# Altium PCB pcb-acopians-powerspy-ac-power-hw.PcbDoc
Units mm, origin at the board's own origin, x right, y up, seen from the top; angles counter-clockwise.
Board outline 89.94 x 79.95 mm, 2 copper layers (Top Layer, Bottom Layer), stack 1.58 mm thick; 60 components, 43 nets, 218 pads, 0 vias.
Unrouted connection lines stored in the file: 3.
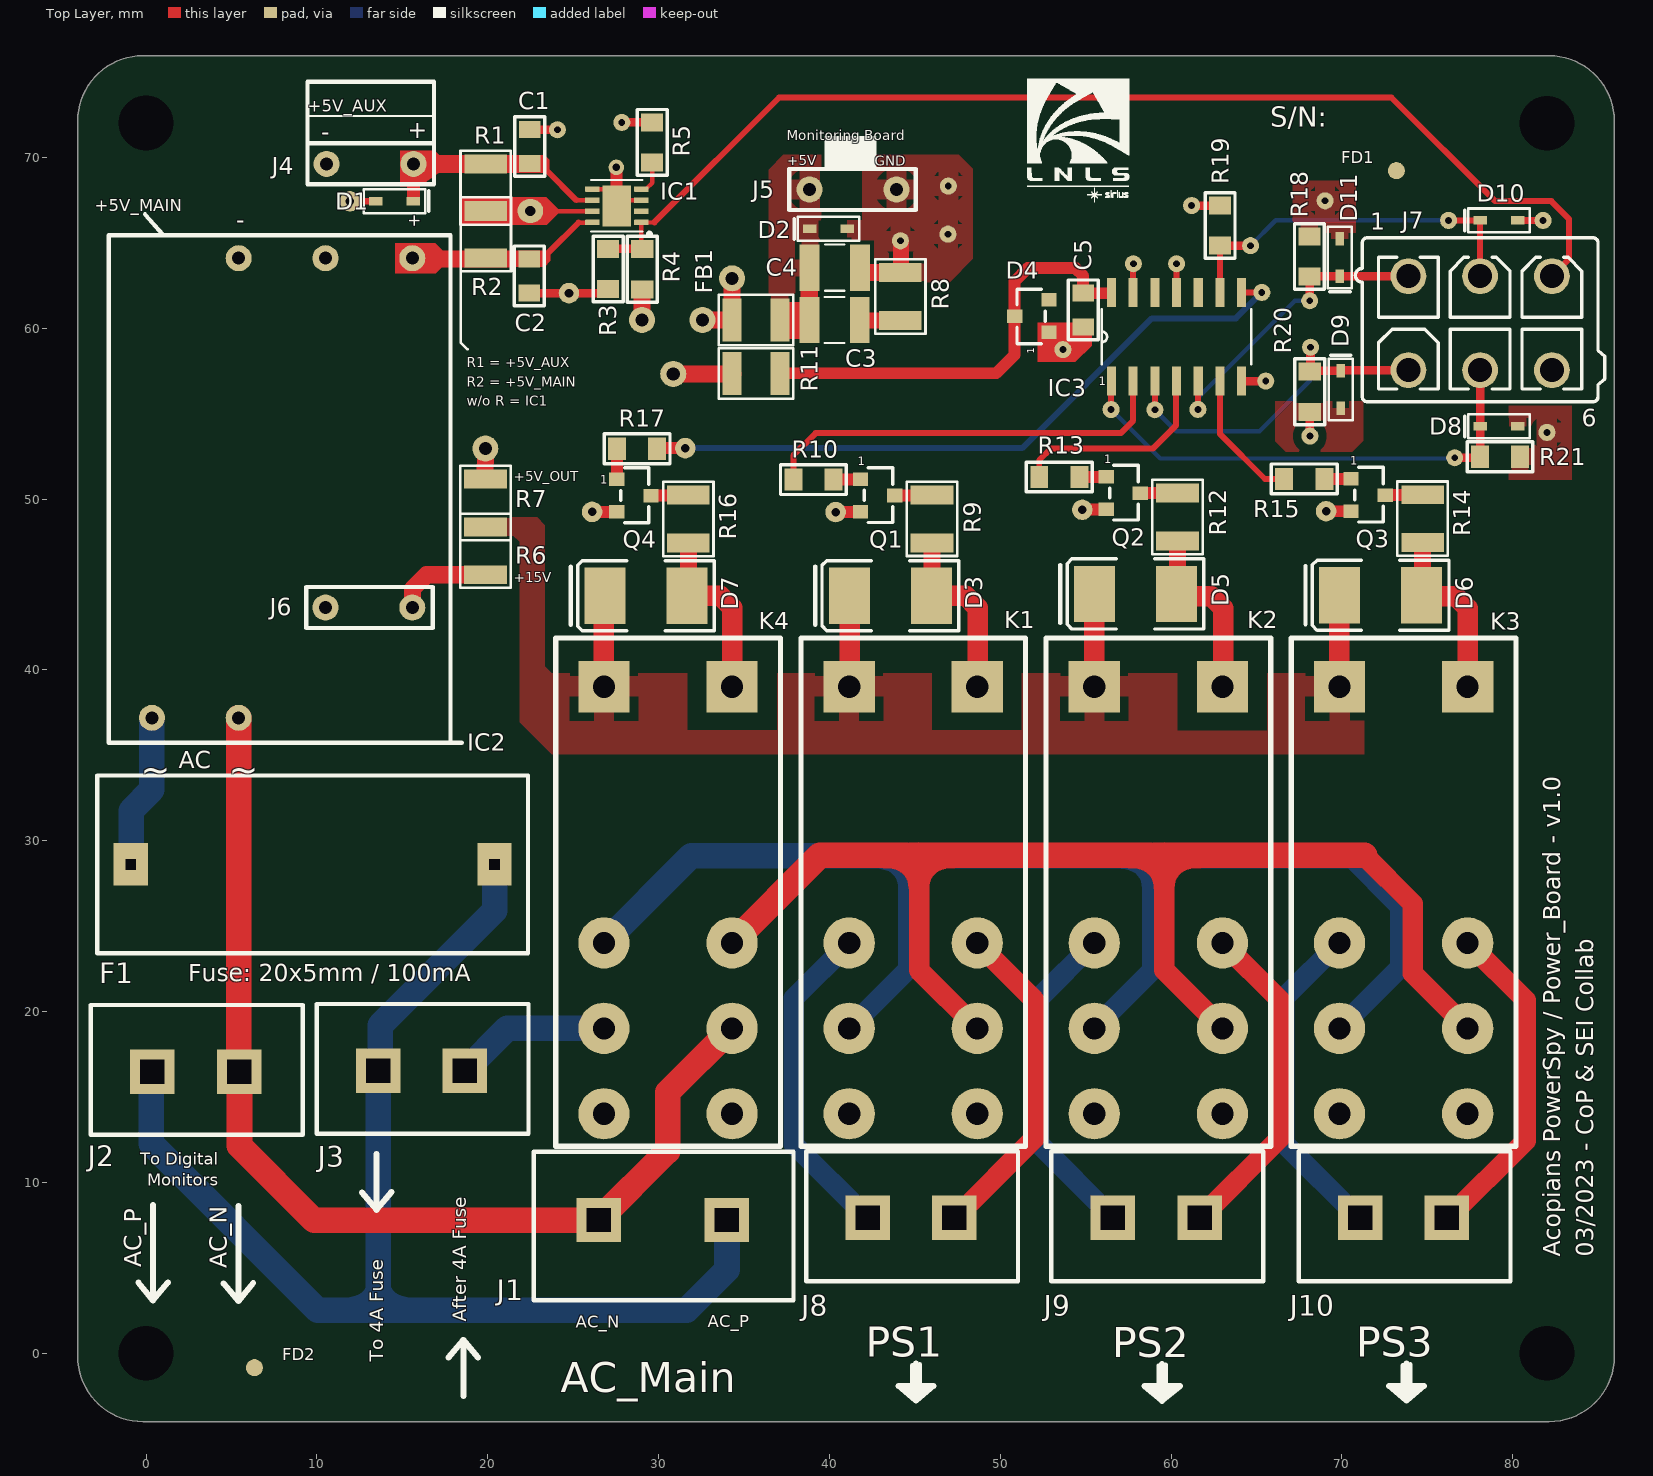
[diagram p0: Top Layer view]
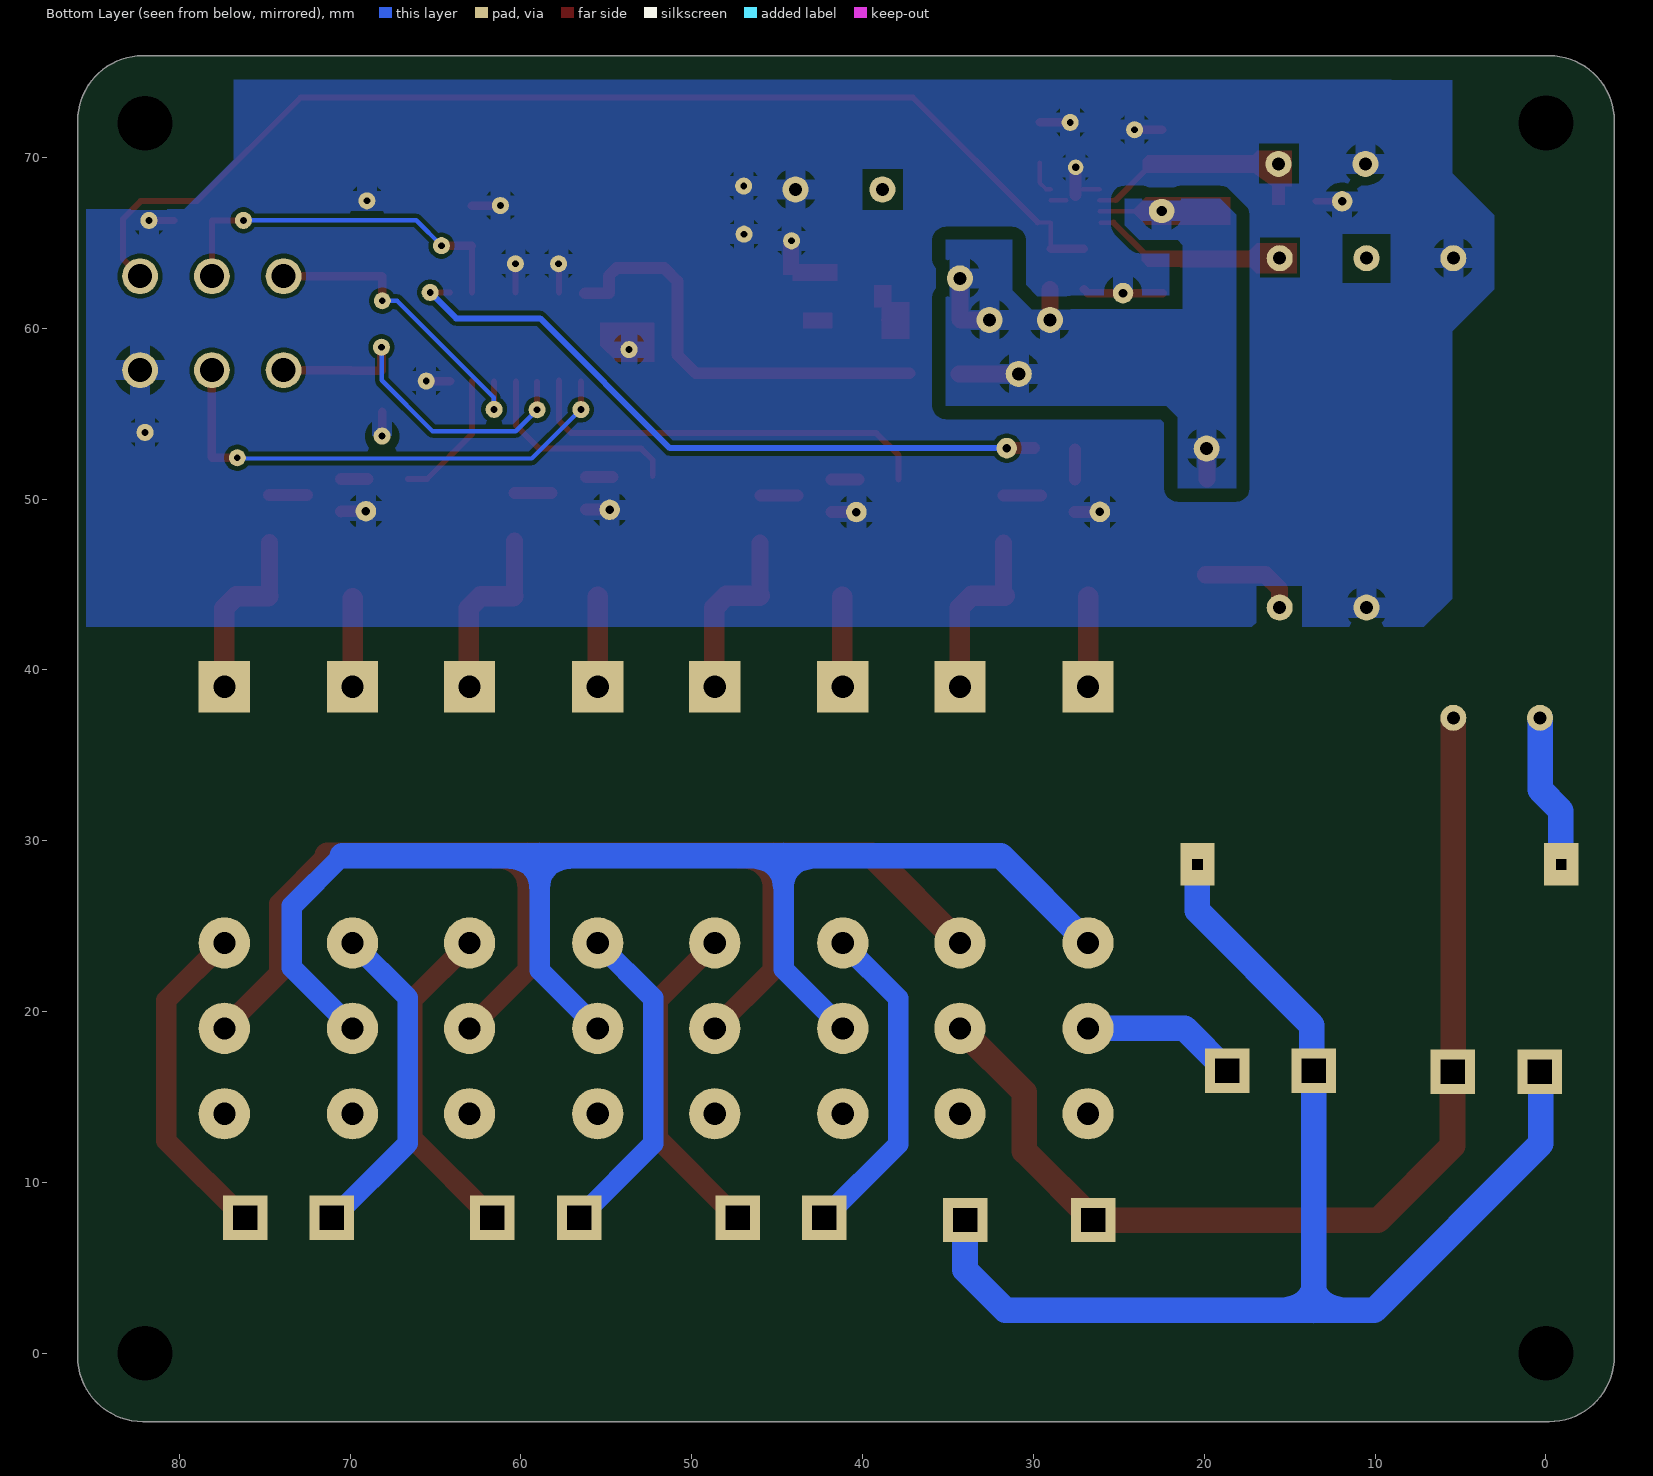
[diagram p1: Bottom Layer view, seen from below]
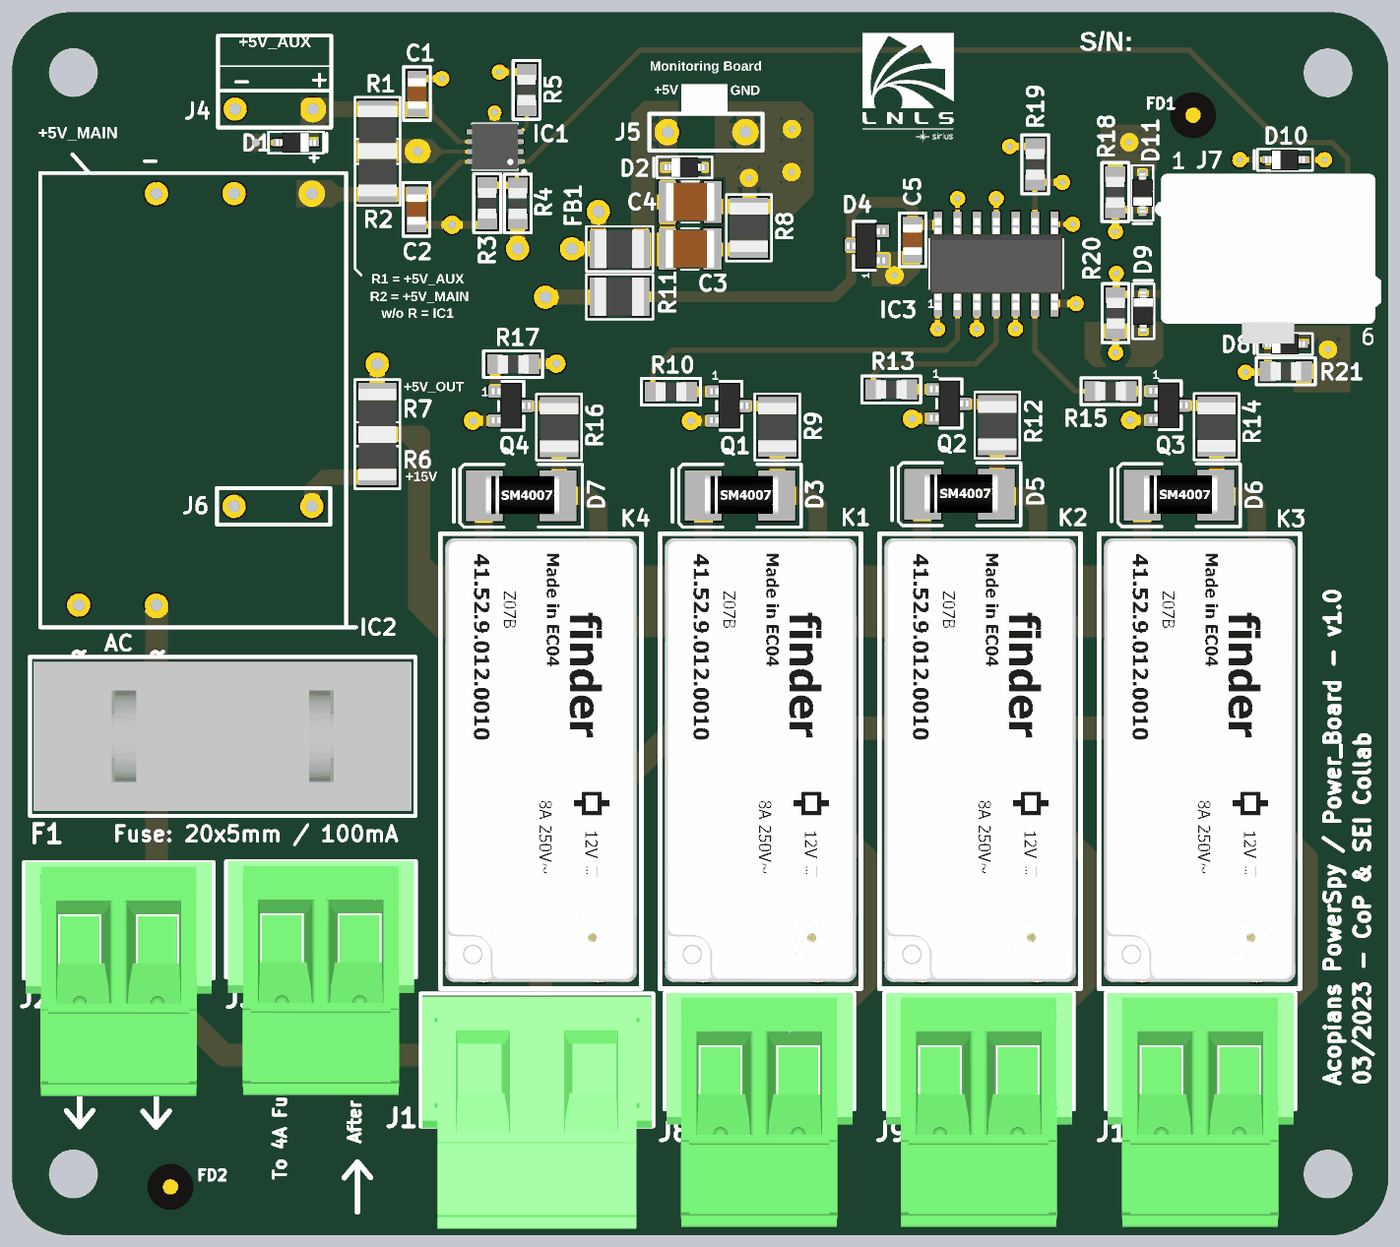
[diagram p2: 3D render of the assembled board from above, using the file's embedded part models]

## Layer stack, top to bottom
Top Solder: solder mask 0.01, Solder Resist, Dk 3.5
Top Layer: signal copper 0.035
Dielectric 1: dielectric 1.51, FR-4, Dk 4.8
Bottom Layer: signal copper 0.035
Bottom Solder: solder mask 0.01, Solder Resist, Dk 3.5

## Board outline
-3.998,-0.19 -3.998,72.138 cw(c-0.188,72.138) -0.188,75.948 82.127,75.948 cw(c82.127,72.138) 85.937,72.138 85.937,-0.19 cw(c82.127,-0.19) 82.127,-4 -0.188,-4 cw(c-0.188,-0.19)

## Design rules (kind name [scope] priority, off if disabled: settings)
Clearance [All] p1: gap=0.254 ignorepadtopadclearanceinfootprint=FALSE except(0: Arc-Hole Track-Hole SMDPad-Hole THPad-Hole Via-Hole Fill-Hole Poly-Hole Region-Hole Text-Hole; 0.127: SMDPad-SMDPad; 0.762: Poly-Poly)
HoleSize [All] p1: absolutevalues=TRUE maxlimit=3.5 minlimit=0.025 maxpercent=80.000 minpercent=20.000
MinimumSolderMaskSliver [All] p1: minsoldermaskwidth=0.035
PolygonConnect [All] p1: thpad.connectstyle=Relief thpad.reliefconductorwidth=1.2 thpad.reliefentries=4 thpad.polygonreliefangle="90 Angle" thpad.airgapwidth=0.5 smdpad.connectstyle=Relief smdpad.reliefconductorwidth=1 smdpad.reliefentries=4 smdpad.polygonreliefangle="90 Angle" smdpad.airgapwidth=0.254 via.connectstyle=Relief via.reliefconductorwidth=0.508 via.reliefentries=2 via.polygonreliefangle="90 Angle" via.airgapwidth=0.254
RoutingVias [All] p1: holewidth=0.711 width=1.27 viastyle="Through Hole" minholewidth=0.711 minwidth=1.27 maxholewidth=0.711 maxwidth=1.27
SilkToSilkClearance [All] p1: silktosilkclearance=0
SilkToSolderMaskClearance [IsPad] p1: minsilkscreentomaskgap=0.05 clearancetoexposedcopper=TRUE
SolderMaskExpansion [All] p1: expansion=0.102 istentingtop=FALSE
Width [All] p1: maxlimit=2 minlimit=0.254 preferedwidth=0.5
26 further rules are at their usual default settings.

## Classes and differential pairs
component class electromechanical-switching-hw: C5 C? D3 D4 D5 D6 D7 IC3 K1 K2 K3 K4 Q1 Q2 Q3 Q4 R9 R10 R11 R12 R13 R14 R15 R16 R17
component class connectors-hw: D8 D9 D10 D11 J7 J8 J9 J10 R18 R19 R20 R21
component class ac-dc-converter-hw: C1 C2 C3 C4 D1 D2 F1 FB1 IC1 IC2 J1 J2 J3 J4 J5 J6 R1 R2 R3 R4 R5 R6 R7 R8

## Components (designator, comment, footprint, x,y, rotation, side; value= is the part's Value field where it differs from the comment)
C1 "100nF" C0805 22.454,70.637 r270 top
C2 "100nF" C0805 22.425,63.06 r90 top
C3 "Generic_Cap_Filter" C1210 40.299,60.48 r180 top
C4 "Generic_Cap_Filter" C1210 40.316,63.547 r180 top
C5 "100nF" C0805 54.849,61.072 r90 top
D1 "SP4208-01FTG" SOD-323 14.547,67.435 r0 top
D2 "SP4208-01FTG" SOD-323 39.94,65.814 r180 top
D3 "SM4007" SM4007 41.164,44.349 r0 top
D4 "BZX84C3V3" SOT_23_3 51.855,60.708 r90 top
D5 "SM4007" SM4007 55.517,44.445 r0 top
D6 "SM4007" SM4007 69.865,44.379 r0 top
D7 "SM4007" SM4007 26.866,44.338 r0 top
D8 "CDSOD323-T05L" SOD-323 79.184,54.258 r180 top
D9 "CDSOD323-T05L" SOD-323 69.926,56.411 r90 top
D10 "CDSOD323-T05L" SOD-323 79.184,66.309 r180 top
D11 "CDSOD323-T05L" SOD-323 69.872,64.141 r270 top
F1 "20x5mm" "Fuse XL-007" 20.402,28.617 r180 top locked
FB1 "?" R1210 35.7,60.478 r0 top
IC1 "TPS2115ADRBR" VSON-8 27.556,67.166 r180 top
IC2 "XL-007" XL-007 17.824,35.746 r90 top
IC3 "74HC04" SOIC-14 56.506,56.903 r0 top
J1 "1766660" "CONECTOR 2 VIAS ESPAçADO" 34.001,7.801 r180 top locked
J2 "1755736" "CONECTOR 2 VIAS" 0.366,16.486 r0 top
J3 "1755736" "CONECTOR 2 VIAS" 13.583,16.542 r0 top locked
J4 "+15VDC Connector" "+15VDC CONNECTOR" 15.652,69.62 r270 top
J5 "+15VDC Connector" "+15VDC CONNECTOR" 38.842,68.118 r90 top
J6 "+15VDC Connector" "+15VDC CONNECTOR" 15.584,43.648 r270 top
J7 "Molex 39-28-1063" MOLEX_39-28-1063 78.086,60.293 r0 top
J8 "1755736" "CONECTOR 2 VIAS" 42.234,7.923 r0 top locked
J9 "1755736" "CONECTOR 2 VIAS" 56.585,7.923 r0 top locked
J10 "1755736" "CONECTOR 2 VIAS" 71.063,7.923 r0 top locked
K1 "41.52.9.005.0010" 41.52.9.005.0010 45.027,26.211 r270 top locked
K2 "41.52.9.005.0010" 41.52.9.005.0010 59.377,26.211 r270 top locked
K3 "41.52.9.005.0010" 41.52.9.005.0010 73.727,26.211 r270 top locked
K4 "41.52.9.005.0010" 41.52.9.005.0010 30.677,26.211 r270 top locked
Q1 "BSS138" SOT_23_3 42.819,50.204 r270 top
Q2 "BSS138" SOT_23_3 57.193,50.348 r270 top
Q3 "BSS138" SOT_23_3 71.531,50.231 r270 top
Q4 "BSS138" SOT_23_3 28.559,50.199 r270 top
R1 "0R" R1210 19.878,68.219 r270 top
R2 "0R" R1210 19.885,65.5 r270 top
R3 "9k1" "RESISTOR 0805" 27.046,62.292 r90 top
R4 "4k7" "RESISTOR 0805" 29.041,62.277 r90 top
R5 "500R" "RESISTOR 0805" 29.622,69.701 r90 top
R6 "0R" R1210 19.868,46.972 r90 top
R7 "0R" R1210 19.868,49.766 r90 top
R8 "0R" R1210 44.15,61.861 r270 top
R9 "0R" R1210 46.004,48.841 r90 top
R10 "4k7" "RESISTOR 0805" 40.235,51.142 r180 top
R11 "170R" R1210 35.696,57.345 r0 top
R12 "0R" R1210 60.378,48.95 r90 top
R13 "4k7" "RESISTOR 0805" 54.631,51.291 r180 top
R14 "0R" R1210 74.72,48.852 r90 top
R15 "4k7" "RESISTOR 0805" 68.965,51.176 r180 top
R16 "0R" R1210 31.742,48.827 r90 top
R17 "4k7" "RESISTOR 0805" 27.566,52.945 r0 top
R18 "1k" "RESISTOR 0805" 68.096,65.369 r270 top
R19 "1k" "RESISTOR 0805" 62.861,67.185 r270 top
R20 "1k" "RESISTOR 0805" 68.114,55.103 r90 top
R21 "1k" "RESISTOR 0805" 80.422,52.479 r180 top

## Footprints (in the part's own frame and the unit in brackets; to place one, negate y for a bottom-side part, rotate by r counter-clockwise, add the part's x,y. Pads: shape width x height; smd on the part's side, far side on the other; paste and mask are expansions set on the pad)
41.52.9.005.0010 [mm] "Low Profile PCB Relay, 2 CO DPDT, 8A, Coil: 5VDC"
  round 3 hole 1.3: 11(7.193,-3.873) 12(2.193,-3.873) 14(12.193,-3.873) 21(7.193,3.627) 22(2.193,3.627) 24(12.193,3.627)
  rect 3x3 hole 1.3: A1(-12.807,-3.873) A2(-12.807,3.627)
  silkscreen extent -15.66,-6.7 14.09,6.45, body extent -15.35,-6.37 13.65,6.13, height 15.78
"+15VDC CONNECTOR" [mil]
  round 60 hole 30: 1(0,0) 2(0,-200)
  silkscreen extent -47,-244 47,47
C0805 [mm]
  rect 1x1.25 smd: 1(-1,0) 2(1,0)
  silkscreen extent -1.75,-0.87 1.75,0.87, body extent -1,-0.62 1,0.63, height 1.01
C1210 [mm]
  rect 1.16x2.72 smd: 1(-1.475,0) 2(1.475,0)
  silkscreen extent -0.57,-1.35 0.57,1.35, body extent -1.6,-1.25 1.6,1.25, height 1.9
"CONECTOR 2 VIAS" [mm]
  rect 2.6x2.6 hole 1.4 square: 1(0,0) 2(5.08,0)
  silkscreen extent -3.6,-3.7 8.8,3.9, body extent -3.48,-11.4 8.68,3.9, height 21.98
"CONECTOR 2 VIAS ESPAçADO" [mm]
  rect 2.6x2.6 hole 1.4 square: 1(0,0) 2(7.5,0)
  silkscreen extent -3.9,-4 11.3,4.7, body extent -3.8,-3.8 11.2,11.4, height 22.03
"Fuse XL-007" [mm]
  rect 2x2.5 hole 0.6 square paste+0 mask+0.102: 1(0,0) 2(21.3,0)
  silkscreen extent -1.95,-5.2 23.25,5.2, body extent -1.7,-4.88 23,4.87, height 11.2
MOLEX_39-28-1063 [mm] "4.20mm (.165\") Pitch Mini-Fit Jr. Header, Dual Row, Vertical, without Snap-in Plastic Peg PCB Lock, 6 Circuits"
  round 2.1 hole 1.4: 1(-4.2,2.75) 2(0,2.75) 3(4.2,2.75) 4(-4.2,-2.75) 5(0,-2.75) 6(4.2,-2.75)
  silkscreen extent -7.3,-4.6 7.3,5, body extent -7.3,-6 7.3,5, height 12.8
R1210 [mm]
  rect 1.106x2.5 smd: 1(-1.403,0) 2(1.403,0)
  silkscreen extent -2.17,-1.48 2.17,1.48, body extent -1.62,-1.25 1.58,1.25, height 0.72
"RESISTOR 0805" [mm]
  rect 1.05x1.3 smd: 1(0,0) 2(2.35,0)
  silkscreen extent -0.75,-0.87 3.1,0.87, body extent 0.17,-0.6 2.18,0.59, height 0.72
SM4007 [mm]
  rect 2.4x3.3 smd: 1(0,0) 2(4.8,0)
  silkscreen extent -2,-2.05 6.4,2.05, body extent 0.1,-1.2 4.9,1.3, height 2.5
SOD-323 [mm]
  rect 0.8x0.5 smd: 1(1.1,0) 2(-1.1,0)
  silkscreen extent -1.8,-0.7 2,0.7, body extent -1.3,-0.67 1.3,0.67, height 1.1
SOIC-14 [mil]
  rect 21x67 smd: 1(0,0) 2(50,0) 3(100,0) 4(150,0) 5(200,0) 6(250,0) 7(300,0) 8(300,204) 9(250,204) 10(200,204) 11(150,204) 12(100,204) 13(50,204) 14(0,204)
  silkscreen extent -22,39 322,165, body extent -20,-16 320,220, height 69
SOT_23_3 [mm]
  rect 0.8x0.9 smd: 1(-0.95,-1) 2(0.95,-1) 3(0,1)
  silkscreen extent -1.63,-0.77 1.58,0.87, body extent -1.53,-1.2 1.48,1.3, height 1.02
VSON-8 [mm]
  rrect25% 0.86x0.32 smd mask+0.07: 1(-1.435,0.975) 2(-1.435,0.325) 3(-1.435,-0.325) 4(-1.435,-0.975) 5(1.435,-0.975) 6(1.435,-0.325) 7(1.435,0.325) 8(1.435,0.975)
  rect 1.65x2.4 smd paste-2 mask+0.07: 9(0,0)
  silkscreen extent -2,-1.5 1.5,1.75, body extent -1.5,-1.5 1.5,1.5, height 1
XL-007 [mil]
  round 60 hole 30: 1(57.09,688.19) 2(57.09,488.19) 3(1116.14,488.19) 4(1116.14,288.19) 5(1116.14,88.19)
  silkscreen extent 0,0 1169,787

## Part data
C1 C2 C5: library part "Capacitor 100nF"
D1 D2: "Unidirectional TVS Diode", Supplier Part Number 1=54AH3799, Supplier 1=Newark
D4: library part "Zener BZX84C3V3", "Zener Diode 3V3"
D8 D9 D10 D11: "Unidirectional TVS Diode", Supplier 1=Avnet, Supplier Part Number 1=CDSOD323-T05L
F1: library part "Fuse XL-007", "Footprint: ZH242 (Metaltex)"
FB1: library part "Ferrite Bead"
IC1: "Auto Switching Power Mux", Supplier 1="Arrow Electronics", Supplier Part Number 1=TPS2115ADRBR
IC2: "AC-DC Converter (220VAC to +5VDC)"
IC3: library part "74HC04 - SOIC14", "SOIC14"
J1: library part "Conector Phoenix 2 vias_espaçado", "Pitch 7.5mm"
J2 J3 J8 J9 J10: library part "Conector Phoenix 2 vias"
J7: library part "Connector 6 Male"
K1 K2 K3 K4: "Low Profile PCB Relay, 2 CO DPDT, 8A, Coil: 5VDC"
Q1 Q2 Q3 Q4: "MOSFET N-Channel", Supplier Part Number 1=BSS138DKR-ND, Supplier 1=Digi-Key
R1 R2 R6 R7 R8 R9 R12 R14 R16: library part "Resistor 0R", "Size 1210"
R3: library part "Resistor 9k1"
R4 R10 R13 R15 R17: library part "Resistor 4k7", "Size 0805"
R5: library part "Resistor 500R"
R11: library part "Resistor 170R", "Size 1210"
R18 R19 R20 R21: library part "Resistor 1k"

## Free pads (board coordinates)
  round 0 hole 3.2 unplated: 1(0,0) 1(0,72.01) 1(82.004,-0.005) 1(82.004,71.995)
  round 1 smd paste-1 mask+1: 1(6.345,-0.843) 1(73.182,69.22)
  round 1.524 hole 0.762: 1(19.86,52.953) 1(29.036,60.487) 1(30.858,57.323) 1(32.564,60.482) 1(34.306,62.92)
  round 1 hole 0.4: 1(24.075,71.617) 1(27.847,72.043) 1(44.158,65.117) 1(46.938,65.502) 1(46.959,68.315) 1(53.666,58.745) 1(56.488,55.239) 1(57.788,63.772) 1(59.047,55.226) 1(60.319,63.772) 1(61.201,67.18) 1(61.566,55.247) 1(65.308,62.094) 1(65.538,56.906) 1(68.11,61.608) 1(68.122,53.684) 1(68.158,58.886) 1(69.011,67.457) 1(76.237,66.313) 1(76.597,52.419) 1(81.768,66.306) 1(81.998,53.903) 2(64.647,64.83)
  round 1.2 hole 0.5: 1(26.108,49.248) 3(24.756,62.055) 3(31.563,52.98) 3(40.361,49.237) 3(54.801,49.371) 3(69.069,49.289)
  round 0.9 hole 0.45: 1(27.528,69.414)
  round 1.2 hole 0.5 mask+0.102: 3(11.928,67.427)
  oval 1.5x1.4 hole 0.6: 3(22.496,66.863)

## Nets (pads, with @x,y where several pads share a name; then routed paths per layer and width w, separated by ;. In a path a pad name is that pad's centre, name@x,y a point inside that pad or via, vN(x,y) a via of type N, cw(c..) or ccw(c..) an arc to the next point about the centre after c; other vN are vias at no path point)
+3V3_DIV: C5.2 D4.3 IC3.14 R11.2 | length 25.3
  Top Layer w0.7: R11.2@37.263,57.363 49.764,57.363 50.844,58.444 50.844,60.697 50.844,62.759 51.607,63.522 54.396,63.522 54.849,63.068 C5.2 C5.2 ; C5.2@54.831,62.051 C5.2 ; IC3.14@56.252,62.046 54.876,62.045 C5.2
+5V_AUX: C1.2 D1.1 IC1.6 J4.1 R1.1 | length 3.4
  Top Layer w0.254: 25.186,67.491 IC1.6 26.141,67.491 IC1.6@26.143,67.494
  Top Layer w0.35: 23.449,69.229 25.186,67.491
+5V_MAIN: C2.2 IC1.8 IC2.5 R2.2 | length 3.3
  Top Layer w0.254: R2.2@19.81,64.095 R2.2@19.86,64.045 ; 25.31,66.177 26.069,66.177 IC1.8@26.077,66.169
  Top Layer w0.35: 23.581,64.447 25.31,66.177
+5V_OUT: FB1.1 IC1.7 pad.1@19.86,52.953 pad.1@29.036,60.487 pad.1@30.858,57.323 pad.1@32.564,60.482 pad.1@34.306,62.92 pad.3@22.496,66.863 R1.2 R2.1 R4.1 R7.2 R11.1 | length 14.1
  Top Layer w0.254: 23.548,66.924 23.725,66.747 ; 23.739,66.841 IC1.7 ; pad.1@29.036,60.528 pad.1@29.061,60.502 ; R4.1@29.036,62.272 R4.1 ; FB1.1@34.269,60.482 FB1.1@34.307,60.52 ; pad.1@34.276,62.932 pad.1@34.306,62.902 ; R11.1@34.343,57.323 R11.1@34.396,57.27
  Top Layer w0.7: R7.2@19.852,51.162 R7.2@19.852,51.169
  Top Layer w1: R7.2@19.852,51.169 pad.1@19.86,52.953 ; pad.1@29.036,60.528 R4.1@29.036,62.272 ; pad.1@30.858,57.323 R11.1@34.343,57.323 ; pad.1@32.564,60.482 FB1.1@34.269,60.482 ; FB1.1@34.306,60.52 pad.1@34.306,62.902
  Bottom Layer w0.254: pad.1@19.86,52.953 pad.1@19.86,53.084
+15V: J6.1 R6.1 | length 5.9
  Top Layer w0.254: J6.1 15.588,43.653 J6.1@15.647,43.712 ; R6.1@19.924,45.555 R6.1@19.931,45.562 ; R6.1@19.936,45.569 R6.1@19.955,45.55
  Top Layer w1: J6.1@15.588,43.65 15.588,43.653 15.588,44.733 16.425,45.569 R6.1@19.936,45.569
+V_Relay: D3.1 D5.1 D6.1 D7.1 K1.A1 K2.A1 K3.A1 K4.A1 R6.2 R7.1 | length 21
  Top Layer w1: K4.A1@26.804,38.969 K4.A1
  Top Layer w1.2: K4.A1 D7.1@26.804,44.277 ; K1.A1@41.175,39.036 D3.1@41.175,44.294 ; K2.A1@55.486,39.027 D5.1@55.486,44.285 ; K3.A1@69.851,39.027 D6.1@69.851,44.205
AC_N: IC2.2 J1.2 J2.2 K4.21 | length 62.3
  Top Layer w1.3: IC2.2 IC2.2@5.435,37.184 ; J2.2@5.435,16.443 J2.2@5.437,16.441
  Top Layer w1.5: J2.2@5.435,16.443 IC2.2@5.435,37.184 ; J2.2@5.472,16.441 5.472,12.143 9.836,7.779 J1.2@26.52,7.779 ; J1.2@26.474,7.788 30.528,11.841 30.528,15.267 K4.21@34.233,18.972
AC_N_RELAY_OUTPUT: K1.21 K2.21 K3.21 K4.22 | length 75
  Top Layer w1.2: 45.243,29.273 45.243,29.149 45.243,22.429 K1.21 ; 59.591,29.216 59.591,29.149 59.591,22.431 K2.21 ; 71.314,29.135 74.137,26.312 74.137,22.235 K3.21
  Top Layer w1.5: K4.22 39.435,29.149 45.243,29.149 59.591,29.149 71.3,29.149 71.314,29.135
AC_P: F1.1 J1.1 J2.1 J3.1 | length 74.9
  Top Layer w0.254: F1.1@20.413,28.378 F1.1@20.413,28.624
  Bottom Layer w1.5: J2.1@0.303,16.484 0.303,12.266 10.043,2.526 13.583,2.526 ; F1.1 20.402,25.901 13.704,19.203 13.704,16.663 J3.1 13.583,2.526 ; J1.1@34.003,7.747 34.003,4.896 31.634,2.526 13.583,2.526
AC_P_RELAY_OUTPUT: K1.11 K2.11 K3.11 K4.12 | length 81.7
  Bottom Layer w1.2: K1.11 44.617,22.482 44.617,29.106 ; K2.11 58.898,22.412 58.898,29.114 58.88,29.132 ; K3.11 73.399,22.563 73.399,26.185 70.452,29.132
  Bottom Layer w1.5: K4.12 31.918,29.132 44.644,29.132 ; 44.617,29.106 44.644,29.132 ; 70.452,29.132 58.88,29.132 44.644,29.132
ACOPIAN_DISABLE: IC3.8 pad.1@65.308,62.094 pad.3@31.563,52.98 R17.2 | length 40.4
  Top Layer w0.254: R17.2 R17.2@29.951,52.98 ; pad.3@31.563,52.98 31.629,52.98 pad.3@31.642,52.968
  Top Layer w0.35: IC3.8@64.14,62.094 pad.1@65.308,62.094
  Top Layer w0.7: R17.2@29.951,52.98 pad.3@31.563,52.98
  Bottom Layer w0.35: pad.3@31.563,52.98 51.279,52.98 58.876,60.577 63.791,60.577 pad.1@65.308,62.094
GND: C1.1 C2.1 C4.1 C5.1 D1.2 D2.2 D4.1 D8.2 D9.2 D10.2 D11.2 IC1.3 IC1.5 IC1.9 IC2.3 IC3.7 IC3.11 IC3.13 J4.2 J5.2 J6.2 J7.6 pad.1@24.075,71.617 pad.1@26.108,49.248 pad.1@27.528,69.414 pad.1@27.847,72.043 pad.1@44.158,65.117 pad.1@46.938,65.502 pad.1@46.959,68.315 pad.1@53.666,58.745 pad.1@57.788,63.772 pad.1@60.319,63.772 pad.1@61.201,67.18 pad.1@65.538,56.906 pad.1@68.122,53.684 pad.1@69.011,67.457 pad.1@81.768,66.306 pad.1@81.998,53.903 pad.3@11.928,67.427 pad.3@24.756,62.055 pad.3@40.361,49.237 pad.3@54.801,49.371 pad.3@69.069,49.289 Q1.2 Q2.2 Q3.2 Q4.2 R3.1 R5.2 R8.1 R18.1 R19.1 R20.1 R21.1 | length 28.5
  Top Layer w0.254: C2.1 C2.1@22.431,62.055 ; C1.1 C1.1@22.474,71.617 ; pad.1@24.064,71.617 pad.1@24.076,71.605 ; IC1.5 27.09,68.141 IC1.9@27.103,68.128 ; IC1.9@27.528,67.793 IC1.9@27.529,67.791 ; Q4.2@27.582,49.239 Q4.2@27.583,49.238 ; pad.1@27.624,72.041 pad.1@27.633,72.051 ; IC1.9@28.077,67.498 28.085,67.491 IC1.3 ; R5.2@29.621,72.043 R5.2@29.625,72.039 ; pad.3@40.504,49.251 pad.3@40.506,49.249 ; Q1.2@41.814,49.249 Q1.2 ; C5.1@54.843,60.033 C5.1@54.881,60.071 ; IC3.13 IC3.13@57.782,62.091 ; pad.1@57.782,63.756 pad.1@57.798,63.772 ; R19.1@62.867,67.18 R19.1@62.879,67.168 ; IC3.7 IC3.7@64.128,56.9 ; pad.1@65.308,56.905 65.303,56.9 pad.1@65.538,56.906 ; D10.2 D10.2@80.286,66.307 ; pad.1@81.767,66.307 pad.1@81.772,66.302
  Top Layer w0.35: IC3.13@57.782,62.091 pad.1@57.782,63.756 ; IC3.11 pad.1@60.316,63.768
  Top Layer w0.4: pad.3@11.932,67.431 D1.2@13.461,67.431 ; D10.2@80.286,66.307 pad.1@81.767,66.307
  Top Layer w0.5: C2.1@22.431,62.055 24.756,62.055 26.809,62.055 R3.1 ; C1.1@22.474,71.617 pad.1@24.064,71.617 ; pad.1@27.847,72.043 R5.2@29.621,72.043 ; pad.1@61.201,67.18 R19.1@62.867,67.18 ; IC3.7@64.128,56.9 65.308,56.905 pad.1@65.538,56.906 ; R20.1 68.118,55.099 68.118,53.688 pad.1@68.122,53.684
  Top Layer w0.7: pad.1@26.108,49.248 27.559,49.239 Q4.2@27.582,49.239 ; IC1.9@27.528,67.793 pad.1@27.528,69.414 ; pad.3@40.506,49.249 Q1.2@41.814,49.249 ; pad.3@54.885,49.398 Q2.2 ; pad.3@69.069,49.289 Q3.2@70.535,49.277
NetC3_1: C3.1 R8.2
NetC3_2: C3.2 C4.2 D2.1 FB1.2 J5.1 | length 0
  Top Layer w0.254: C3.2@38.799,60.478 C3.2@38.808,60.487
NetD3_2: D3.2 K1.A2 R9.1 | length 10.7
  Top Layer w0.254: D3.2@46.004,44.397 D3.2@46.032,44.37 ; K1.A2 K1.A2@48.711,39.075
  Top Layer w1: D3.2@46.004,44.397 R9.1
  Top Layer w1.2: D3.2@46.032,44.332 47.97,44.332 48.667,43.635 K1.A2@48.667,39.031
NetD5_2: D5.2 K2.A2 R12.1 | length 10.6
  Top Layer w0.254: D5.2@60.378,44.557 D5.2@60.434,44.501
  Top Layer w1: D5.2@60.378,44.557 R12.1
  Top Layer w1.2: D5.2@60.434,44.314 62.346,44.314 63.043,43.617 K2.A2@63.043,39.013
NetD6_2: D6.2 K3.A2 R14.1 | length 10.5
  Top Layer w0.254: D6.2@74.72,44.481 D6.2@74.79,44.412
  Top Layer w1: D6.2@74.72,44.481 R14.1
  Top Layer w1.2: D6.2@74.79,44.315 76.664,44.315 77.361,43.618 K3.A2@77.361,39.014
NetD7_2: D7.2 K4.A2 R16.1 | length 10.7
  Top Layer w0.254: D7.2@31.729,44.321 31.742,44.333 D7.2@31.742,44.338 ; K4.A2@34.315,39.037 K4.A2@34.32,39.032
  Top Layer w1: D7.2@31.742,44.338 R16.1
  Top Layer w1.2: D7.2 31.742,44.338 33.618,44.338 34.315,43.641 K4.A2@34.315,39.037
NetD8_1: D8.1 IC3.1 J7.5 pad.1@56.488,55.239 pad.1@76.597,52.419 R21.2 | length 29.5
  Top Layer w0.254: R21.2@78.05,52.88 R21.2@78.07,52.86 ; R21.2@78.105,52.894 R21.2@78.121,52.878 ; R21.2@78.14,52.966 R21.2@78.174,53.001
  Top Layer w0.35: pad.1@56.487,55.246 IC3.1@56.487,56.872
  Top Layer w0.5: pad.1@76.597,52.419 R21.2@78.053,52.419 ; R21.2@78.084,52.479 D8.1@78.084,54.172 ; D8.1@78.086,54.172 J7.5
  Bottom Layer w0.254: pad.1@56.499,55.238 59.365,52.372 pad.1@76.611,52.372
NetD9_1: D9.1 IC3.3 J7.4 pad.1@59.047,55.226 pad.1@68.158,58.886 R20.2 | length 21.7
  Top Layer w0.254: R20.2 R20.2@68.158,57.497 ; pad.1@68.149,59.101 pad.1@68.186,59.138 ; R20.2@68.151,57.474 R20.2@68.188,57.511 ; pad.1@68.158,58.886 68.158,58.888 pad.1@68.162,58.892 ; D9.1 D9.1@69.958,57.543 ; J7.4 73.906,57.543 J7.4@73.916,57.554
  Top Layer w0.35: pad.1@59.046,55.233 IC3.3@59.046,56.859
  Top Layer w0.5: R20.2@68.158,57.497 pad.1@68.158,58.886 ; R20.2@68.188,57.511 D9.1 ; D9.1@69.958,57.543 J7.4
  Bottom Layer w0.254: pad.1@59.047,55.226 60.3,53.972 65.168,53.972 68.146,56.95 68.146,58.868 pad.1@68.151,58.873
NetD10_1: D10.1 IC3.9 J7.2 pad.1@76.237,66.313 pad.2 R19.2 | length 21.9
  Top Layer w0.254: IC3.9 IC3.9@62.858,62.087 ; R19.2@62.856,64.798 R19.2@62.881,64.824 ; pad.1@76.237,66.313 pad.1@76.239,66.311 ; J7.2@78.064,63.038 J7.2@78.086,63.06 ; D10.1 D10.1@78.086,66.307 ; D10.1@78.088,66.305 D10.1@78.101,66.317
  Top Layer w0.35: IC3.9 R19.2@62.856,64.798 ; pad.1@76.239,66.311 D10.1@78.07,66.311 ; J7.2@78.086,63.06 D10.1@78.086,66.307
  Top Layer w0.5: R19.2@62.881,64.83 pad.2
  Bottom Layer w0.254: pad.2@64.619,64.811 66.12,66.313 pad.1@76.237,66.313
NetD11_1: D11.1 IC3.5 J7.1 pad.1@61.566,55.247 pad.1@68.11,61.608 R18.2 | length 18.9
  Top Layer w0.254: pad.1@68.02,61.429 68.023,61.431 68.1,61.432 68.109,61.593 pad.1@68.1,61.395 ; R18.2@68.023,62.999 R18.2@68.041,63.017 ; R18.2 R18.2@68.11,63.005 ; pad.1@68.11,61.608 pad.1@68.125,61.592 ; D11.1@69.83,63.026 D11.1@69.839,63.017 ; D11.1@69.869,63.039 D11.1@69.871,63.041 ; J7.1@73.88,63.037 J7.1@73.881,63.035
  Top Layer w0.35: pad.1@61.576,55.235 IC3.5@61.576,56.893
  Top Layer w0.5: pad.1@68.11,61.608 R18.2@68.11,63.005 ; R18.2@68.127,63.041 D11.1@69.871,63.041 ; D11.1@69.873,63.043 J7.1
  Bottom Layer w0.254: pad.1@61.596,55.277 61.596,55.955 67.241,61.6 pad.1@68.11,61.6
NetF1_2: F1.2 IC2.1 | length 9.1
  Bottom Layer w1.5: F1.2@-0.872,28.604 -0.872,31.766 0.341,32.979 IC2.1@0.341,37.155
NetIC1_1: IC1.1 J7.3 R3.2 R4.2 | length 67.6
  Top Layer w0.254: R4.2@29.022,64.576 28.991,64.607 28.991,64.642 IC1.1 29.749,66.191
  Top Layer w0.35: 29.749,66.191 37.061,73.503 72.892,73.503 78.963,67.432 82.25,67.432 83.281,66.4 83.281,64.039 J7.3
  Top Layer w0.5: R3.2 R4.2@28.991,64.642
NetIC1_4: IC1.4 R5.1 | length 2
  Top Layer w0.254: IC1.4 29.261,68.141 29.624,68.504 R5.1@29.624,69.691
NetJ3_2: J3.2 K4.11 | length 9.2
  Top Layer w0.254: K4.11 26.814,19.018 K4.11@26.815,19.017
  Bottom Layer w1.5: J3.2 21.14,19.018 K4.11
NetJ8_1: J8.1 K1.12 | length 19.2
  Bottom Layer w1.2: K1.12 37.918,20.782 37.918,12.239 J8.1
NetJ8_2: J8.2 K1.22 | length 19.5
  Top Layer w1.2: J8.2@47.347,7.923 J8.2@47.413,7.988 ; J8.2@47.413,7.923 J8.2@47.413,7.988 ; J8.2@47.413,8.022 J8.2@47.413,7.988 ; K1.22 51.994,20.678 51.994,12.57 J8.2@47.413,7.988
NetJ9_1: J9.1 K2.12 | length 21.1
  Bottom Layer w0.8: K2.12@55.002,24.16 K2.12@55.504,24.663
  Bottom Layer w1: K2.12@55.002,23.963 55.504,23.963 K2.12 K2.12@55.504,24.663
  Bottom Layer w1.2: K2.12@55.501,24.035 52.265,20.799 52.265,12.255 J9.1@56.581,7.94
NetJ9_2: J9.2 K2.22 | length 19.6
  Top Layer w1: K2.22@62.417,24.1 K2.22@62.494,24.022
  Top Layer w1.2: J9.2@61.662,7.894 66.351,12.583 66.351,20.693 K2.22@63.01,24.033
NetJ10_1: J10.1 K3.12 | length 19.4
  Bottom Layer w1: K3.12@69.678,24.049 K3.12@69.776,24.147
  Bottom Layer w1.2: K3.12@69.864,24.061 66.628,20.825 66.628,12.282 J10.1@70.943,7.966
NetJ10_2: J10.2 K3.22 | length 19.5
  Top Layer w1: J10.2 J10.2@76.198,7.978
  Top Layer w1.2: J10.2@76.142,7.84 80.745,12.444 80.745,20.662 K3.22@77.405,24.002
NetQ1_1: Q1.1 R10.1 | length 1.6
  Top Layer w0.254: Q1.1@41.824,51.142 Q1.1@41.825,51.141
  Top Layer w0.7: R10.1 Q1.1@41.824,51.142
NetQ1_3: Q1.3 R9.2 | length 2.2
  Top Layer w0.254: R9.2@45.971,50.204 R9.2@45.972,50.205
  Top Layer w0.7: Q1.3 R9.2@45.971,50.204
NetQ2_1: Q2.1 R13.1 | length 1.6
  Top Layer w0.254: Q2.1@56.193,51.291 Q2.1@56.199,51.297
  Top Layer w0.7: R13.1 Q2.1@56.193,51.291
NetQ2_3: Q2.3 R12.2 | length 2.3
  Top Layer w0.254: R12.2@60.378,50.348 R12.2@60.434,50.292
  Top Layer w0.7: Q2.3 R12.2@60.378,50.348
NetQ3_1: Q3.1 R15.1 | length 1.6
  Top Layer w0.254: Q3.1@70.528,51.176 Q3.1@70.543,51.192 ; Q3.1 Q3.1@70.542,51.192
  Top Layer w0.7: R15.1 Q3.1@70.528,51.176
NetQ3_3: Q3.3 R14.2 | length 2.2
  Top Layer w0.254: R14.2@74.743,50.231 R14.2@74.751,50.223
  Top Layer w0.7: Q3.3 R14.2@74.743,50.231
NetQ4_1: Q4.1 R17.1 | length 1.8
  Top Layer w0.254: R17.1@27.542,52.923 R17.1@27.559,52.906
  Top Layer w0.7: Q4.1 R17.1@27.559,52.906
NetQ4_3: Q4.3 R16.2 | length 2.2
  Top Layer w0.254: R16.2@31.751,50.199 R16.2@31.766,50.214
  Top Layer w0.7: Q4.3 R16.2@31.751,50.199
PS1_DISABLE: IC3.2 R10.2 | length 24.5
  Top Layer w0.35: R10.2 37.885,52.554 39.191,53.859 57.051,53.859 57.78,54.588 IC3.2@57.78,56.948
PS2_DISABLE: IC3.4 R13.2 | length 12.4
  Top Layer w0.254: R13.2 R13.2@52.281,51.416 ; IC3.4@60.295,56.884 IC3.4@60.308,56.896
  Top Layer w0.35: R13.2@52.281,51.416 52.281,52.286 52.943,52.948 58.931,52.948 60.295,54.313 IC3.4@60.295,56.884
PS3_DISABLE: IC3.6 R15.2 | length 7.9
  Top Layer w0.35: IC3.6 62.856,53.812 65.491,51.176 R15.2
pads on no net: D4.2 IC1.2 IC2.4 IC3.10 IC3.12 K1.14 K1.24 K2.14 K2.24 K3.14 K3.24 K4.14 K4.24

## Polygon pours and split planes (outlines as drawn)
GND on Top Layer "GND_L01_P015" (solid, pour order 15): 79.765,51.127 82.939,51.127 83.448,51.127 83.448,55.466 79.765,55.466
GND on Top Layer "GND_L01_P014" (solid, pour order 14): 66.695,52.766 70.603,52.766 71.235,53.398 71.235,55.722 66.088,55.722 66.088,53.373
GND on Top Layer "GND_L01_P012" (solid, pour order 12): 67.129,65.59 70.806,65.59 70.806,68.616 67.602,68.616 67.129,68.616
GND on Top Layer "GND_L01_P010" (solid, pour order 10): 41.316,70.139 41.316,62.687 47.029,62.687 48.397,64.055 48.397,69.323 47.581,70.139
NetC3_2 on Top Layer "NETC3_2_L01_P008" (solid, pour order 8): 37.304,70.147 39.535,70.147 39.535,59.235 36.442,59.235 36.442,69.285
+V_Relay on Top Layer "+V_RELAY_L01_P000" (solid, remove dead copper, pour order 0): 23.334,40.213 23.334,48.479 22.887,48.926 18.654,48.926 18.654,47.966 21.392,47.966 21.868,47.49 21.868,36.949 23.74,35.077 71.317,35.077 71.317,39.8 23.747,39.8
GND on Bottom Layer "GND_L02_P009" (solid, pour order 9): 5.483,74.515 5.483,69.069 3.028,66.614 3.028,62.273 5.483,59.818 5.483,44.178 7.15,42.511 21.844,42.511 85.449,42.511 85.449,66.962 79.709,66.962 76.816,69.854 76.816,74.551 74.796,74.552 9.069,74.552
+5V_OUT on Bottom Layer "+5V_OUT_L02_P004" (solid, pour order 4): 24.667,67.571 19.067,67.571 18.132,66.636 18.132,50.62 21.562,50.62 21.562,54.783 22.233,55.454 35.139,55.454 35.139,65.169 31.231,65.169 31.231,62.217 30.132,61.119 21.258,61.119 21.258,61.768 21.258,64.864 21.562,65.169 23.812,65.169 24.667,66.023

## Other copper
Top Layer:
  rectangle net NetC3_1: 41.747,59.981 43.496,60.906
  rectangle net GND: 43.719,63.111 44.645,65.045
  rectangle net GND: 41.455,62.771 44.097,63.758
  rectangle net NetC3_2: 38.315,61.216 39.341,62.538
  rectangle net NetC3_2: 37.258,59.364 38.883,61.547
  pour cut-out: -3.823,41.198 -3.823,-0.299 ccw(c-0.35,-0.299) -0.35,-3.772 82.179,-3.772 ccw(c82.179,-0.215) 85.736,-0.215 85.736,34.593 23.769,34.593 21.618,36.744 21.618,41.198
  region net GND: 52.197,60.325 52.197,58.031 54.397,58.031 55.339,58.973 55.339,60.325
  pour cut-out: 41.315,70.156 41.315,66.316 41.907,66.316 41.907,70.156
  region net +5V_MAIN: 23.327,63.584 21.411,63.584 21.404,63.577 17.322,63.577 16.966,63.221 14.587,63.221 14.587,64.972 16.922,64.972 17.37,64.523 23.664,64.523 23.673,63.936
  region net +5V_AUX: 15.276,67.238 15.276,68.303 14.869,68.303 14.869,68.711 14.869,70.004 14.869,70.205 14.869,70.392 15.056,70.392 15.256,70.392 16.885,70.392 17.16,70.118 23.331,70.118 23.591,69.858 23.591,69.109 17.164,69.109 17.144,69.109 16.02,68.303 16.02,67.231
  region net +5V_OUT: 18.487,67.672 18.487,66.057 23.44,66.057 24.234,66.851 23.413,67.672
  pour cut-out: 74.732,41.561 74.732,36.464 79.994,36.464 79.994,41.561
  pour cut-out: 60.356,41.522 60.356,36.425 65.618,36.425 65.618,41.522
  pour cut-out: 45.985,41.57 45.985,36.473 51.247,36.473 51.247,41.57
  pour cut-out: 31.689,41.57 31.689,36.473 36.951,36.473 36.951,41.57
Bottom Layer:
  pour cut-out: -3.834,41.197 -3.834,-0.288 ccw(c-0.355,-0.288) -0.355,-3.767 82.154,-3.767 ccw(c82.154,-0.196) 85.725,-0.196 85.725,34.593 23.755,34.593 21.624,36.724 21.624,41.197
  pour cut-out: 37.652,69.305 37.652,66.945 39.991,66.945 39.991,69.305
  pour cut-out: 14.41,65.302 16.723,65.302 16.723,62.989 14.41,62.989
  pour cut-out: 9.108,65.511 11.884,65.511 11.884,62.655 9.108,62.655
  pour cut-out: 14.464,70.804 16.776,70.804 16.776,68.491 14.464,68.491
  pour cut-out: 14.265,44.928 16.959,44.928 16.959,42.517 14.265,42.517

## Silkscreen, mask and mechanical layers (free items; w line width, h text height)
Top Overlay:
  drawing of 1520 lines, arcs and shapes, not listed
  text "+5V_AUX" at 9.456,72.444 h1.2
  text "S/N:" at 65.798,71.408 h2
  text "+" at 15.332,71.125 h1
  text "-" at 10.253,71.012 h1
  text "Monitoring Board" at 37.513,70.79 h1
  text "FD1" at 69.963,69.657 h0.7
  text "+5V" at 37.518,69.324 h1
  text "GND" at 42.648,69.299 h1
  text "+5V_MAIN" at -2.995,66.62 h1.2
  text "R1 = +5V_AUX" at 18.783,57.509 h1
  text "R2 = +5V_MAIN" at 18.783,56.355 h1
  text "w/o R = IC1" at 18.782,55.266 h1
  text "+5V_OUT" at 21.52,50.825 h1
  text "+15V" at 21.513,44.925 h1
  text "~" at -0.304,33.436 h1.52
  text "~" at 4.827,33.415 h1.52
  text "Fuse: 20x5mm / 100mA" at 2.47,21.764 h1
  text "To Digital" at -0.328,11.044 h0.7
  text "Monitors" at 0.081,9.799 h0.7
  text "Acopians PowerSpy / Power_Board - v1.0" at 82.765,5.664 h1 r90
  text "03/2023 - CoP & SEI Collab" at 84.715,5.664 h1 r90
  text "AC_P" at -0.269,5.031 h1 r90
  text "AC_N" at 4.734,4.992 h1 r90
  text "After 4A Fuse" at 18.753,1.858 h0.8 r90
  text "AC_N" at 25.157,1.501 h0.7
  text "AC_P" at 32.876,1.523 h0.7
  text "FD2" at 7.967,-0.413 h0.7
  text "To 4A Fuse" at 13.881,-0.507 h0.8 r90
  text "PS1" at 42.138,-0.785 h3
  text "PS2" at 56.543,-0.805 h3
  text "PS3" at 70.845,-0.787 h3
  text "AC_Main" at 24.275,-2.875 h3
Mechanical 1:
  the board outline again, w0.254
Mechanical 13:
  circle w0.254: c55.591,57.146 r0.134
  text "J4" at 12.019,69.01 h1.2
  text "J5" at 40.135,67.588 h1.2
  text "J6" at 12.021,43.092 h1.2

## Text inside footprints (layer, text, board x,y; h text height)
D4: Mechanical 29 "1" at 53.155,59.008 h0.5 r90; Top Overlay "1" at 51.987,58.493 h0.4 r90
IC2: Top Overlay "-" at 5.777,66.607 h1 r180; Top Overlay "AC" at 1.906,34.231 h1; Top Overlay "+" at 16.011,65.875 h0.7 r90
IC3: Top Overlay "1" at 55.752,56.659 h0.5
J7: Top Overlay "1" at 71.664,65.766 h1; Top Overlay "6" at 84.047,54.257 h1; Mechanical 14 "1" at 70.388,65.564 h1; Mechanical 14 "6" at 82.216,54.294 h1
K1: Mechanical 29 "RL?" at 43.979,32.868 h1.52 r270
K2: Mechanical 29 "RL?" at 58.329,32.868 h1.52 r270
K3: Mechanical 29 "RL?" at 72.679,32.868 h1.52 r270
K4: Mechanical 29 "RL?" at 29.629,32.868 h1.52 r270
Q1: Mechanical 29 "1" at 41.519,51.904 h0.5 r270; Top Overlay "1" at 41.654,51.968 h0.5
Q2: Mechanical 29 "1" at 55.893,52.048 h0.5 r270; Top Overlay "1" at 56.074,52.087 h0.5
Q3: Mechanical 29 "1" at 70.231,51.931 h0.5 r270; Top Overlay "1" at 70.472,52.017 h0.5
Q4: Mechanical 29 "1" at 27.259,51.899 h0.5 r270; Top Overlay "1" at 26.599,50.889 h0.5